# EAGLE board 13848-LilyPad-E-Sewing-Kit-Panel_v15 (EAGLE 7.7.0), part 1 of 2
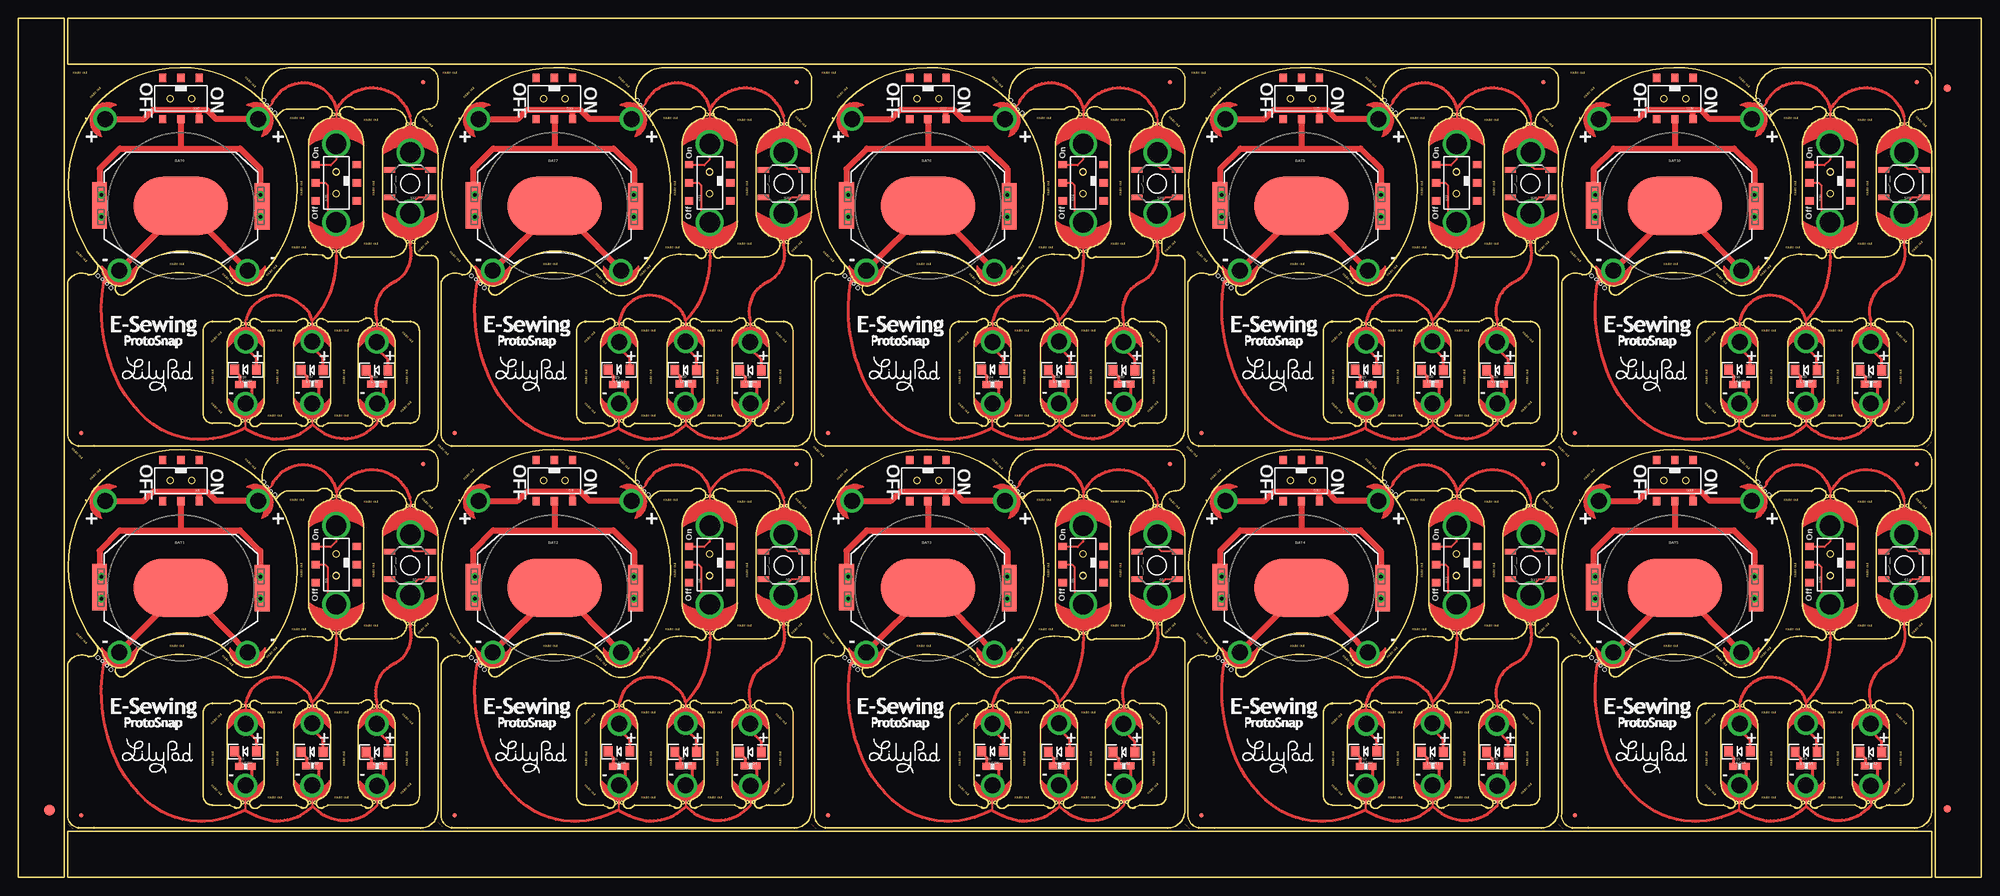
[diagram p0: board, top side]
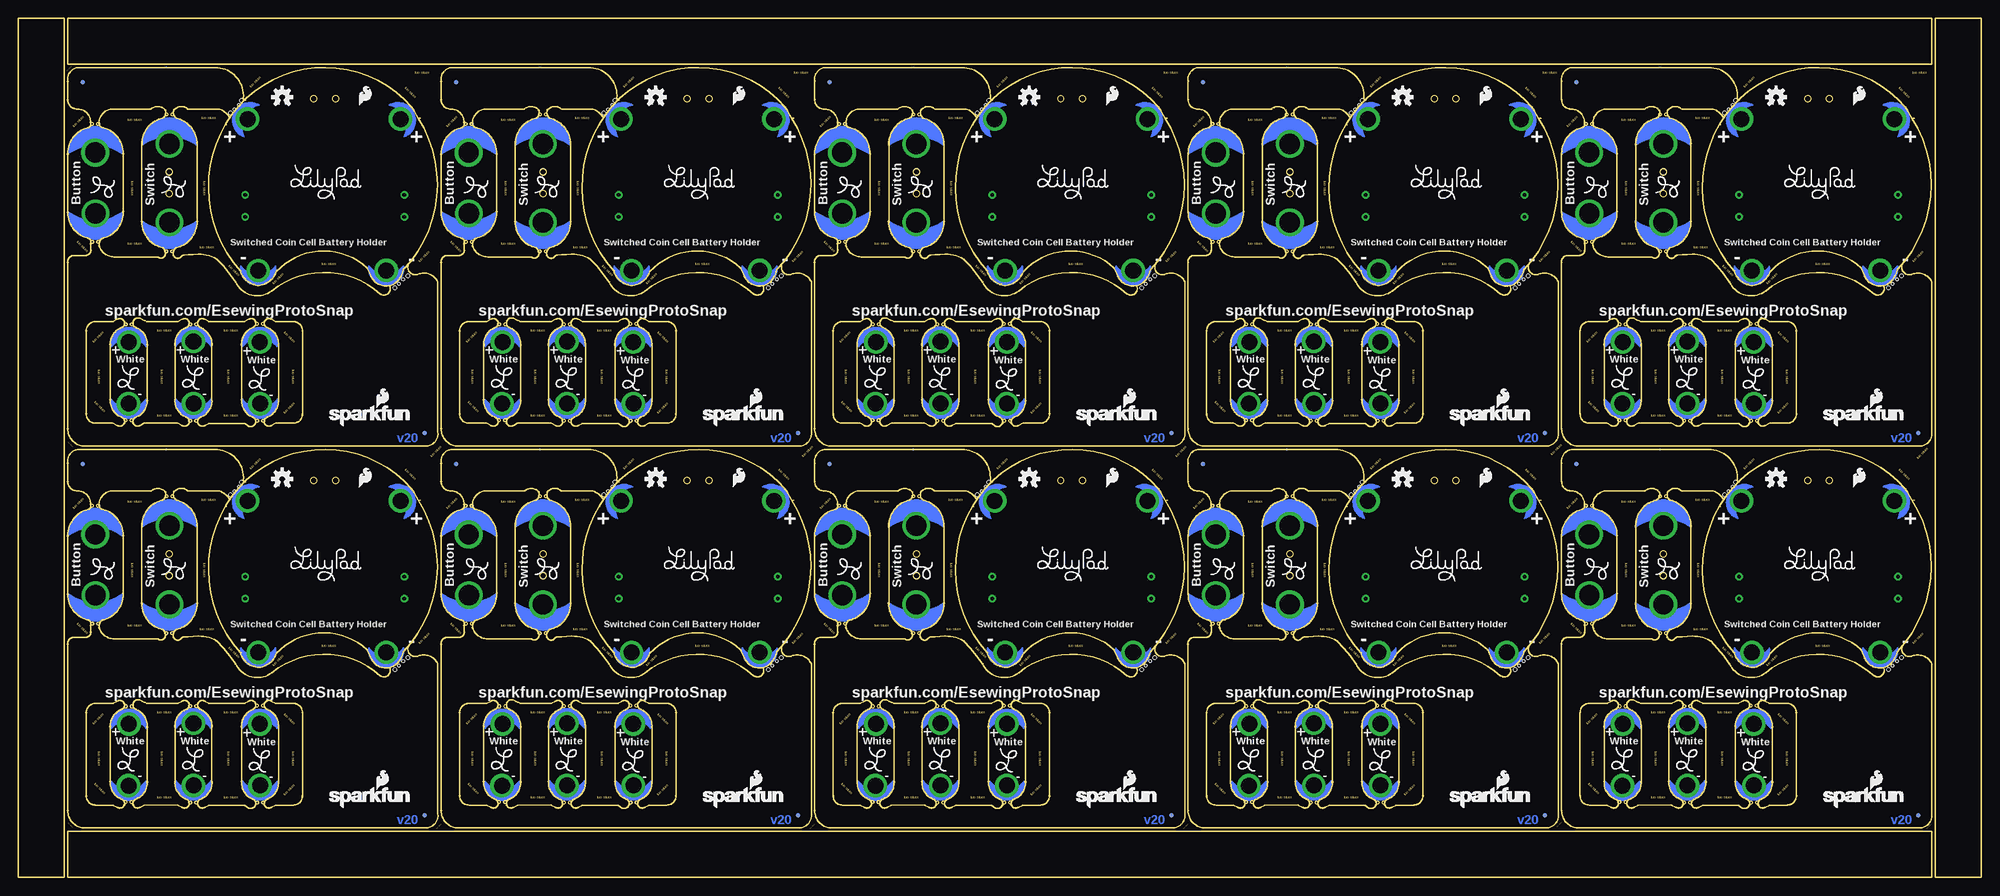
[diagram p1: board, bottom side, seen from below]

Size 269.7 x 118.08 mm. Coordinates in mm from the lower left corner, seen from the top.
Outline: 10824 segments
Outline: circle at 43.28,52.36 radius 0.19
Outline: circle at 44.12,52.36 radius 0.19
Outline: circle at 53.49,51.07 radius 0.19
Outline: circle at 54.33,51.07 radius 0.19
Outline: circle at 48.85,23.51 radius 0.19
Outline: circle at 49.68,23.51 radius 0.19
Outline: circle at 39.96,23.54 radius 0.19
Outline: circle at 40.79,23.54 radius 0.19
Outline: circle at 30.84,23.61 radius 0.19
Outline: circle at 31.68,23.61 radius 0.19
Outline: circle at 31.63,10.28 radius 0.19
Outline: circle at 30.79,10.28 radius 0.19
Outline: circle at 40.82,10.28 radius 0.19
Outline: circle at 39.98,10.28 radius 0.19
Outline: circle at 49.71,10.35 radius 0.19
Outline: circle at 48.87,10.35 radius 0.19
Outline: circle at 54.28,34.86 radius 0.19
Outline: circle at 53.44,34.86 radius 0.19
Outline: circle at 44.15,33.57 radius 0.19
Outline: circle at 43.31,33.57 radius 0.19
Copper layers (1*16): Top 0.035mm / dielectric 1.5mm / Bottom 0.035mm
Design rules "SparkFun-2-layer-STANDARD *": minimum track width 10mil, minimum drill 20mil, track to track 10mil, track to pad 8mil, pad to pad 8mil, via to via 10mil, smd to smd 8mil, copper to edge 8mil, drill to drill 8mil, minimum pad ring 10mil, minimum via ring 10mil, stop-mask expansion 4mil, vias tented up to drill 25mil, thermal gap 10mil
Net classes: 1 VCC: width 0.203 mm
Holes 0.51 mm at 10.93,30.21 12.74,28.53 33.78,54.3 35.29,52.6 62.24,30.21 64.05,28.53 85.08,54.3 86.6,52.6 113.55,30.21 115.35,28.53 136.39,54.3 137.91,52.6 164.86,30.21 166.66,28.53 187.7,54.3 189.22,52.6 216.17,30.21 217.97,28.53 239.01,54.3 240.53,52.6 10.93,82.68 12.74,81.01 33.78,106.77 35.29,105.08 62.24,82.68 64.05,81.01 85.08,106.77 86.6,105.08 113.55,82.68 115.35,81.01 136.39,106.77 137.91,105.08 164.86,82.68 166.66,81.01 187.7,106.77 189.22,105.08 216.17,82.68 217.97,81.01 239.01,106.77 240.53,105.08

## Footprints (pad centres in the part's own frame; a part is rotated, then mirrored left to right if it is on the bottom)
BATTCON_20MM_4LEGS = smd 13 x 8: NEGATIVE 0,0 | smd 2.032 x 3.175: POSITIVE@1 -11.176,1.651; POSITIVE@2 -11.176,-1.524; POSITIVE@3 11.176,1.524; POSITIVE@4 11.176,-1.651
PETAL-SMALL-2SIDE = drill 2.2: 1 0,0
PETAL-MEDIUM-2SIDE = drill 2.794: 1 0,-0.254
FIDUCIAL-1.5X3 = smd 1.5 x 1.5: 1 0,0
FIDUCIAL-1X2 = smd 1 x 1: 1 0,0
MICRO-FIDUCIAL = smd 0.635 x 0.635: 1 0,0
LED-1206 = smd 1.2 x 1.4: A -1.5,0; C 1.5,0
MOUST-BITE-1-(2_HOLES) = smd 0.203 x 0.508 bottom: P$1 -0.013,0 | hole 0.381: -0.432,0; 0.406,0
0603-RES = smd 1.1 x 1: 1 -0.85,0; 2 0.85,0
AYZ0202 = smd 1 x 1.15: 1 -2.5,2.825; 2 0,2.825; 3 2.5,2.825; 4 -2.5,-2.825; 5 0,-2.825; 6 2.5,-2.825 | hole 0.85: 1.5,0; -1.5,0
TACTILE-SWITCH-SMD = smd 1.524 x 0.762: 1 -2.794,1.905; 2 2.794,1.905; 3 -2.794,-1.905; 4 2.794,-1.905

## Placement (x,y rotation side)
BAT1  20mm coincell  [BATTCON_20MM_4LEGS]  22.35,39.82 0 top
BAT2  20mm coincell  [BATTCON_20MM_4LEGS]  73.66,39.82 0 top
BAT3  20mm coincell  [BATTCON_20MM_4LEGS]  124.97,39.82 0 top
BAT4  20mm coincell  [BATTCON_20MM_4LEGS]  176.28,39.82 0 top
BAT5  20mm coincell  [BATTCON_20MM_4LEGS]  227.59,39.82 0 top
BAT6  20mm coincell  [BATTCON_20MM_4LEGS]  22.35,92.29 0 top
BAT7  20mm coincell  [BATTCON_20MM_4LEGS]  73.66,92.29 0 top
BAT8  20mm coincell  [BATTCON_20MM_4LEGS]  124.97,92.29 0 top
BAT9  20mm coincell  [BATTCON_20MM_4LEGS]  176.28,92.29 0 top
BAT10  20mm coincell  [BATTCON_20MM_4LEGS]  227.59,92.29 0 top
BATB-  SEWTAP6  [PETAL-SMALL-2SIDE]  13.9,30.93 0 top
BATB-1  SEWTAP6  [PETAL-SMALL-2SIDE]  65.2,30.93 0 top
BATB-2  SEWTAP6  [PETAL-SMALL-2SIDE]  31.5,30.92 0 top
BATB-3  SEWTAP6  [PETAL-SMALL-2SIDE]  82.81,30.92 0 top
BATB-4  SEWTAP6  [PETAL-SMALL-2SIDE]  116.51,30.93 0 top
BATB-5  SEWTAP6  [PETAL-SMALL-2SIDE]  134.11,30.92 0 top
BATB-6  SEWTAP6  [PETAL-SMALL-2SIDE]  167.82,30.93 0 top
BATB-7  SEWTAP6  [PETAL-SMALL-2SIDE]  185.42,30.92 0 top
BATB-8  SEWTAP6  [PETAL-SMALL-2SIDE]  219.13,30.93 0 top
BATB-9  SEWTAP6  [PETAL-SMALL-2SIDE]  236.73,30.92 0 top
BATB-10  SEWTAP6  [PETAL-SMALL-2SIDE]  13.9,83.4 0 top
BATB-11  SEWTAP6  [PETAL-SMALL-2SIDE]  31.5,83.4 0 top
BATB-12  SEWTAP6  [PETAL-SMALL-2SIDE]  65.2,83.4 0 top
BATB-13  SEWTAP6  [PETAL-SMALL-2SIDE]  82.81,83.4 0 top
BATB-14  SEWTAP6  [PETAL-SMALL-2SIDE]  116.51,83.4 0 top
BATB-15  SEWTAP6  [PETAL-SMALL-2SIDE]  134.11,83.4 0 top
BATB-16  SEWTAP6  [PETAL-SMALL-2SIDE]  167.82,83.4 0 top
BATB-17  SEWTAP6  [PETAL-SMALL-2SIDE]  185.42,83.4 0 top
BATB-18  SEWTAP6  [PETAL-SMALL-2SIDE]  219.13,83.4 0 top
BATB-19  SEWTAP6  [PETAL-SMALL-2SIDE]  236.73,83.4 0 top
BATT+  SEWTAP6  [PETAL-SMALL-2SIDE]  11.94,51.76 245 top
BATT+1  SEWTAP6  [PETAL-SMALL-2SIDE]  63.25,51.76 245 top
BATT+2  SEWTAP6  [PETAL-SMALL-2SIDE]  32.95,51.76 115 top
BATT+3  SEWTAP6  [PETAL-SMALL-2SIDE]  84.25,51.76 115 top
BATT+4  SEWTAP6  [PETAL-SMALL-2SIDE]  114.56,51.76 245 top
BATT+5  SEWTAP6  [PETAL-SMALL-2SIDE]  135.56,51.76 115 top
BATT+6  SEWTAP6  [PETAL-SMALL-2SIDE]  165.86,51.76 245 top
BATT+7  SEWTAP6  [PETAL-SMALL-2SIDE]  186.87,51.76 115 top
BATT+8  SEWTAP6  [PETAL-SMALL-2SIDE]  217.17,51.76 245 top
BATT+9  SEWTAP6  [PETAL-SMALL-2SIDE]  238.18,51.76 115 top
BATT+10  SEWTAP6  [PETAL-SMALL-2SIDE]  11.94,104.23 245 top
BATT+11  SEWTAP6  [PETAL-SMALL-2SIDE]  32.95,104.23 115 top
BATT+12  SEWTAP6  [PETAL-SMALL-2SIDE]  63.25,104.23 245 top
BATT+13  SEWTAP6  [PETAL-SMALL-2SIDE]  84.25,104.23 115 top
BATT+14  SEWTAP6  [PETAL-SMALL-2SIDE]  114.56,104.23 245 top
BATT+15  SEWTAP6  [PETAL-SMALL-2SIDE]  135.56,104.23 115 top
BATT+16  SEWTAP6  [PETAL-SMALL-2SIDE]  165.86,104.23 245 top
BATT+17  SEWTAP6  [PETAL-SMALL-2SIDE]  186.87,104.23 115 top
BATT+18  SEWTAP6  [PETAL-SMALL-2SIDE]  217.17,104.23 245 top
BATT+19  SEWTAP6  [PETAL-SMALL-2SIDE]  238.18,104.23 115 top
BUTTON-  SEWTAP8  [PETAL-MEDIUM-2SIDE]  53.89,46.89 180 top
BUTTON-1  SEWTAP8  [PETAL-MEDIUM-2SIDE]  105.2,46.89 180 top
BUTTON-2  SEWTAP8  [PETAL-MEDIUM-2SIDE]  156.51,46.89 180 top
BUTTON-3  SEWTAP8  [PETAL-MEDIUM-2SIDE]  207.82,46.89 180 top
BUTTON-4  SEWTAP8  [PETAL-MEDIUM-2SIDE]  259.12,46.89 180 top
BUTTON-5  SEWTAP8  [PETAL-MEDIUM-2SIDE]  53.89,99.36 180 top
BUTTON-6  SEWTAP8  [PETAL-MEDIUM-2SIDE]  105.2,99.36 180 top
BUTTON-7  SEWTAP8  [PETAL-MEDIUM-2SIDE]  156.51,99.36 180 top
BUTTON-8  SEWTAP8  [PETAL-MEDIUM-2SIDE]  207.82,99.36 180 top
BUTTON-9  SEWTAP8  [PETAL-MEDIUM-2SIDE]  259.12,99.36 180 top
BUTTONS  SEWTAP8  [PETAL-MEDIUM-2SIDE]  53.85,39.06 0 top
BUTTONS1  SEWTAP8  [PETAL-MEDIUM-2SIDE]  105.16,39.06 0 top
BUTTONS2  SEWTAP8  [PETAL-MEDIUM-2SIDE]  156.47,39.06 0 top
BUTTONS3  SEWTAP8  [PETAL-MEDIUM-2SIDE]  207.77,39.06 0 top
BUTTONS4  SEWTAP8  [PETAL-MEDIUM-2SIDE]  259.08,39.06 0 top
BUTTONS5  SEWTAP8  [PETAL-MEDIUM-2SIDE]  53.85,91.53 0 top
BUTTONS6  SEWTAP8  [PETAL-MEDIUM-2SIDE]  105.16,91.53 0 top
BUTTONS7  SEWTAP8  [PETAL-MEDIUM-2SIDE]  156.47,91.53 0 top
BUTTONS8  SEWTAP8  [PETAL-MEDIUM-2SIDE]  207.77,91.53 0 top
BUTTONS9  SEWTAP8  [PETAL-MEDIUM-2SIDE]  259.08,91.53 0 top
E$1  [FIDUCIAL-1.5X3]  4.32,9.27 0 top
E$3  [FIDUCIAL-1X2]  265,108.48 180 top
E$4  [FIDUCIAL-1X2]  265,9.42 0 top
FD1  FIDUCIALUFIDUCIAL  [MICRO-FIDUCIAL]  55.63,56.84 0 top
FD2  FIDUCIALUFIDUCIAL  [MICRO-FIDUCIAL]  8.64,8.58 0 top
FD3  FIDUCIALUFIDUCIAL  [MICRO-FIDUCIAL]  55.63,56.84 0 bottom
FD4  FIDUCIALUFIDUCIAL  [MICRO-FIDUCIAL]  8.64,8.58 0 bottom
FD5  FIDUCIALUFIDUCIAL  [MICRO-FIDUCIAL]  106.94,56.84 0 top
FD6  FIDUCIALUFIDUCIAL  [MICRO-FIDUCIAL]  59.95,8.58 0 top
FD7  FIDUCIALUFIDUCIAL  [MICRO-FIDUCIAL]  106.94,56.84 0 bottom
FD8  FIDUCIALUFIDUCIAL  [MICRO-FIDUCIAL]  59.95,8.58 0 bottom
FD9  FIDUCIALUFIDUCIAL  [MICRO-FIDUCIAL]  158.24,56.84 0 top
FD10  FIDUCIALUFIDUCIAL  [MICRO-FIDUCIAL]  111.25,8.58 0 top
FD11  FIDUCIALUFIDUCIAL  [MICRO-FIDUCIAL]  158.24,56.84 0 bottom
FD12  FIDUCIALUFIDUCIAL  [MICRO-FIDUCIAL]  111.25,8.58 0 bottom
FD13  FIDUCIALUFIDUCIAL  [MICRO-FIDUCIAL]  209.55,56.84 0 top
FD14  FIDUCIALUFIDUCIAL  [MICRO-FIDUCIAL]  162.56,8.58 0 top
FD15  FIDUCIALUFIDUCIAL  [MICRO-FIDUCIAL]  209.55,56.84 0 bottom
FD16  FIDUCIALUFIDUCIAL  [MICRO-FIDUCIAL]  162.56,8.58 0 bottom
FD17  FIDUCIALUFIDUCIAL  [MICRO-FIDUCIAL]  260.86,56.84 0 top
FD18  FIDUCIALUFIDUCIAL  [MICRO-FIDUCIAL]  213.87,8.58 0 top
FD19  FIDUCIALUFIDUCIAL  [MICRO-FIDUCIAL]  260.86,56.84 0 bottom
FD20  FIDUCIALUFIDUCIAL  [MICRO-FIDUCIAL]  213.87,8.58 0 bottom
FD21  FIDUCIALUFIDUCIAL  [MICRO-FIDUCIAL]  55.63,109.31 0 top
FD22  FIDUCIALUFIDUCIAL  [MICRO-FIDUCIAL]  8.64,61.05 0 top
FD23  FIDUCIALUFIDUCIAL  [MICRO-FIDUCIAL]  55.63,109.31 0 bottom
FD24  FIDUCIALUFIDUCIAL  [MICRO-FIDUCIAL]  8.64,61.05 0 bottom
FD25  FIDUCIALUFIDUCIAL  [MICRO-FIDUCIAL]  106.94,109.31 0 top
FD26  FIDUCIALUFIDUCIAL  [MICRO-FIDUCIAL]  59.95,61.05 0 top
FD27  FIDUCIALUFIDUCIAL  [MICRO-FIDUCIAL]  106.94,109.31 0 bottom
FD28  FIDUCIALUFIDUCIAL  [MICRO-FIDUCIAL]  59.95,61.05 0 bottom
FD29  FIDUCIALUFIDUCIAL  [MICRO-FIDUCIAL]  158.24,109.31 0 top
FD30  FIDUCIALUFIDUCIAL  [MICRO-FIDUCIAL]  111.25,61.05 0 top
FD31  FIDUCIALUFIDUCIAL  [MICRO-FIDUCIAL]  158.24,109.31 0 bottom
FD32  FIDUCIALUFIDUCIAL  [MICRO-FIDUCIAL]  111.25,61.05 0 bottom
FD33  FIDUCIALUFIDUCIAL  [MICRO-FIDUCIAL]  209.55,109.31 0 top
FD34  FIDUCIALUFIDUCIAL  [MICRO-FIDUCIAL]  162.56,61.05 0 top
FD35  FIDUCIALUFIDUCIAL  [MICRO-FIDUCIAL]  209.55,109.31 0 bottom
FD36  FIDUCIALUFIDUCIAL  [MICRO-FIDUCIAL]  162.56,61.05 0 bottom
FD37  FIDUCIALUFIDUCIAL  [MICRO-FIDUCIAL]  260.86,109.31 0 top
FD38  FIDUCIALUFIDUCIAL  [MICRO-FIDUCIAL]  213.87,61.05 0 top
FD39  FIDUCIALUFIDUCIAL  [MICRO-FIDUCIAL]  260.86,109.31 0 bottom
FD40  FIDUCIALUFIDUCIAL  [MICRO-FIDUCIAL]  213.87,61.05 0 bottom
LED1  WHITE  [LED-1206]  49.3,17.22 180 top
LED2  WHITE  [LED-1206]  40.39,17.27 180 top
LED3  WHITE  [LED-1206]  31.24,17.32 180 top
LED4  WHITE  [LED-1206]  100.6,17.22 180 top
LED5  WHITE  [LED-1206]  91.69,17.27 180 top
LED6  WHITE  [LED-1206]  82.54,17.32 180 top
LED7  WHITE  [LED-1206]  151.91,17.22 180 top
LED8  WHITE  [LED-1206]  143,17.27 180 top
LED9  WHITE  [LED-1206]  133.85,17.32 180 top
LED10  WHITE  [LED-1206]  203.22,17.22 180 top
LED11  WHITE  [LED-1206]  194.31,17.27 180 top
LED12  WHITE  [LED-1206]  185.16,17.32 180 top
LED13  WHITE  [LED-1206]  254.53,17.22 180 top
LED14  WHITE  [LED-1206]  245.62,17.27 180 top
LED15  WHITE  [LED-1206]  236.47,17.32 180 top
LED16  WHITE  [LED-1206]  49.3,69.7 180 top
LED17  WHITE  [LED-1206]  40.39,69.74 180 top
LED18  WHITE  [LED-1206]  31.24,69.79 180 top
LED19  WHITE  [LED-1206]  100.6,69.7 180 top
LED20  WHITE  [LED-1206]  91.69,69.74 180 top
LED21  WHITE  [LED-1206]  82.54,69.79 180 top
LED22  WHITE  [LED-1206]  151.91,69.7 180 top
LED23  WHITE  [LED-1206]  143,69.74 180 top
LED24  WHITE  [LED-1206]  133.85,69.79 180 top
LED25  WHITE  [LED-1206]  203.22,69.7 180 top
LED26  WHITE  [LED-1206]  194.31,69.74 180 top
LED27  WHITE  [LED-1206]  185.16,69.79 180 top
LED28  WHITE  [LED-1206]  254.53,69.7 180 top
LED29  WHITE  [LED-1206]  245.62,69.74 180 top
LED30  WHITE  [LED-1206]  236.47,69.79 180 top
LED+1  SEWTAP6  [PETAL-SMALL-2SIDE]  49.25,21.1 180 top
LED+2  SEWTAP6  [PETAL-SMALL-2SIDE]  40.39,21.17 180 top
LED+3  SEWTAP6  [PETAL-SMALL-2SIDE]  31.27,21.1 180 top
LED+4  SEWTAP6  [PETAL-SMALL-2SIDE]  100.56,21.1 180 top
LED+5  SEWTAP6  [PETAL-SMALL-2SIDE]  91.7,21.17 180 top
LED+6  SEWTAP6  [PETAL-SMALL-2SIDE]  82.58,21.1 180 top
LED+7  SEWTAP6  [PETAL-SMALL-2SIDE]  151.87,21.1 180 top
LED+8  SEWTAP6  [PETAL-SMALL-2SIDE]  143,21.17 180 top
LED+9  SEWTAP6  [PETAL-SMALL-2SIDE]  133.89,21.1 180 top
LED+10  SEWTAP6  [PETAL-SMALL-2SIDE]  203.18,21.1 180 top
LED+11  SEWTAP6  [PETAL-SMALL-2SIDE]  194.31,21.17 180 top
LED+12  SEWTAP6  [PETAL-SMALL-2SIDE]  185.19,21.1 180 top
LED+13  SEWTAP6  [PETAL-SMALL-2SIDE]  254.49,21.1 180 top
LED+14  SEWTAP6  [PETAL-SMALL-2SIDE]  245.62,21.17 180 top
LED+15  SEWTAP6  [PETAL-SMALL-2SIDE]  236.5,21.1 180 top
LED+16  SEWTAP6  [PETAL-SMALL-2SIDE]  49.25,73.57 180 top
LED+17  SEWTAP6  [PETAL-SMALL-2SIDE]  40.39,73.65 180 top
LED+18  SEWTAP6  [PETAL-SMALL-2SIDE]  31.27,73.57 180 top
LED+19  SEWTAP6  [PETAL-SMALL-2SIDE]  100.56,73.57 180 top
LED+20  SEWTAP6  [PETAL-SMALL-2SIDE]  91.7,73.65 180 top
LED+21  SEWTAP6  [PETAL-SMALL-2SIDE]  82.58,73.57 180 top
LED+22  SEWTAP6  [PETAL-SMALL-2SIDE]  151.87,73.57 180 top
LED+23  SEWTAP6  [PETAL-SMALL-2SIDE]  143,73.65 180 top
LED+24  SEWTAP6  [PETAL-SMALL-2SIDE]  133.89,73.57 180 top
LED+25  SEWTAP6  [PETAL-SMALL-2SIDE]  203.18,73.57 180 top
LED+26  SEWTAP6  [PETAL-SMALL-2SIDE]  194.31,73.65 180 top
LED+27  SEWTAP6  [PETAL-SMALL-2SIDE]  185.19,73.57 180 top
LED+28  SEWTAP6  [PETAL-SMALL-2SIDE]  254.49,73.57 180 top
LED+29  SEWTAP6  [PETAL-SMALL-2SIDE]  245.62,73.65 180 top
LED+30  SEWTAP6  [PETAL-SMALL-2SIDE]  236.5,73.57 180 top
LED-1  SEWTAP6  [PETAL-SMALL-2SIDE]  49.31,12.63 0 top
LED-2  SEWTAP6  [PETAL-SMALL-2SIDE]  40.38,12.65 0 top
LED-3  SEWTAP6  [PETAL-SMALL-2SIDE]  31.24,12.64 0 top
LED-4  SEWTAP6  [PETAL-SMALL-2SIDE]  100.61,12.63 0 top
LED-5  SEWTAP6  [PETAL-SMALL-2SIDE]  91.68,12.65 0 top
LED-6  SEWTAP6  [PETAL-SMALL-2SIDE]  82.55,12.64 0 top
LED-7  SEWTAP6  [PETAL-SMALL-2SIDE]  151.92,12.63 0 top
LED-8  SEWTAP6  [PETAL-SMALL-2SIDE]  142.99,12.65 0 top
LED-9  SEWTAP6  [PETAL-SMALL-2SIDE]  133.86,12.64 0 top
LED-10  SEWTAP6  [PETAL-SMALL-2SIDE]  203.23,12.63 0 top
LED-11  SEWTAP6  [PETAL-SMALL-2SIDE]  194.3,12.65 0 top
LED-12  SEWTAP6  [PETAL-SMALL-2SIDE]  185.17,12.64 0 top
LED-13  SEWTAP6  [PETAL-SMALL-2SIDE]  254.54,12.63 0 top
LED-14  SEWTAP6  [PETAL-SMALL-2SIDE]  245.61,12.65 0 top
LED-15  SEWTAP6  [PETAL-SMALL-2SIDE]  236.48,12.64 0 top
LED-16  SEWTAP6  [PETAL-SMALL-2SIDE]  49.31,65.1 0 top
LED-17  SEWTAP6  [PETAL-SMALL-2SIDE]  40.38,65.13 0 top
LED-18  SEWTAP6  [PETAL-SMALL-2SIDE]  31.24,65.12 0 top
LED-19  SEWTAP6  [PETAL-SMALL-2SIDE]  100.61,65.1 0 top
LED-20  SEWTAP6  [PETAL-SMALL-2SIDE]  91.68,65.13 0 top
LED-21  SEWTAP6  [PETAL-SMALL-2SIDE]  82.55,65.12 0 top
LED-22  SEWTAP6  [PETAL-SMALL-2SIDE]  151.92,65.1 0 top
LED-23  SEWTAP6  [PETAL-SMALL-2SIDE]  142.99,65.13 0 top
LED-24  SEWTAP6  [PETAL-SMALL-2SIDE]  133.86,65.12 0 top
LED-25  SEWTAP6  [PETAL-SMALL-2SIDE]  203.23,65.1 0 top
LED-26  SEWTAP6  [PETAL-SMALL-2SIDE]  194.3,65.13 0 top
LED-27  SEWTAP6  [PETAL-SMALL-2SIDE]  185.17,65.12 0 top
LED-28  SEWTAP6  [PETAL-SMALL-2SIDE]  254.54,65.1 0 top
LED-29  SEWTAP6  [PETAL-SMALL-2SIDE]  245.61,65.13 0 top
LED-30  SEWTAP6  [PETAL-SMALL-2SIDE]  236.48,65.12 0 top
LOGO1  SFE_LOGO_FLAME.1_INCH  [SFE_LOGO_FLAME_.1]  17.91,53.33 0 bottom
LOGO2  OSHW-LOGOS  [OSHW-LOGO-S]  28.2,54.75 0 bottom
LOGO3  SFE_LOGO_NAME_FLAME.1_INCH  [SFE_LOGO_NAME_FLAME_.1]  22.1,9.46 0 bottom
LOGO4  SFE_LOGO_FLAME.1_INCH  [SFE_LOGO_FLAME_.1]  69.22,53.33 0 bottom
LOGO5  OSHW-LOGOS  [OSHW-LOGO-S]  79.5,54.75 0 bottom
LOGO6  SFE_LOGO_NAME_FLAME.1_INCH  [SFE_LOGO_NAME_FLAME_.1]  73.41,9.46 0 bottom
LOGO7  SFE_LOGO_FLAME.1_INCH  [SFE_LOGO_FLAME_.1]  120.53,53.33 0 bottom
LOGO8  OSHW-LOGOS  [OSHW-LOGO-S]  130.81,54.75 0 bottom
LOGO9  SFE_LOGO_NAME_FLAME.1_INCH  [SFE_LOGO_NAME_FLAME_.1]  124.72,9.46 0 bottom
LOGO10  SFE_LOGO_FLAME.1_INCH  [SFE_LOGO_FLAME_.1]  171.83,53.33 0 bottom
LOGO11  OSHW-LOGOS  [OSHW-LOGO-S]  182.12,54.75 0 bottom
LOGO12  SFE_LOGO_NAME_FLAME.1_INCH  [SFE_LOGO_NAME_FLAME_.1]  176.02,9.46 0 bottom
LOGO13  SFE_LOGO_FLAME.1_INCH  [SFE_LOGO_FLAME_.1]  223.14,53.33 0 bottom
LOGO14  OSHW-LOGOS  [OSHW-LOGO-S]  233.43,54.75 0 bottom
LOGO15  SFE_LOGO_NAME_FLAME.1_INCH  [SFE_LOGO_NAME_FLAME_.1]  227.33,9.46 0 bottom
LOGO16  SFE_LOGO_FLAME.1_INCH  [SFE_LOGO_FLAME_.1]  17.91,105.81 0 bottom
LOGO17  OSHW-LOGOS  [OSHW-LOGO-S]  28.2,107.23 0 bottom
LOGO18  SFE_LOGO_NAME_FLAME.1_INCH  [SFE_LOGO_NAME_FLAME_.1]  22.1,61.94 0 bottom
LOGO19  SFE_LOGO_FLAME.1_INCH  [SFE_LOGO_FLAME_.1]  69.22,105.81 0 bottom
LOGO20  OSHW-LOGOS  [OSHW-LOGO-S]  79.5,107.23 0 bottom
LOGO21  SFE_LOGO_NAME_FLAME.1_INCH  [SFE_LOGO_NAME_FLAME_.1]  73.41,61.94 0 bottom
LOGO22  SFE_LOGO_FLAME.1_INCH  [SFE_LOGO_FLAME_.1]  120.53,105.81 0 bottom
LOGO23  OSHW-LOGOS  [OSHW-LOGO-S]  130.81,107.23 0 bottom
LOGO24  SFE_LOGO_NAME_FLAME.1_INCH  [SFE_LOGO_NAME_FLAME_.1]  124.72,61.94 0 bottom
LOGO25  SFE_LOGO_FLAME.1_INCH  [SFE_LOGO_FLAME_.1]  171.83,105.81 0 bottom
LOGO26  OSHW-LOGOS  [OSHW-LOGO-S]  182.12,107.23 0 bottom
LOGO27  SFE_LOGO_NAME_FLAME.1_INCH  [SFE_LOGO_NAME_FLAME_.1]  176.02,61.94 0 bottom
LOGO28  SFE_LOGO_FLAME.1_INCH  [SFE_LOGO_FLAME_.1]  223.14,105.81 0 bottom
LOGO29  OSHW-LOGOS  [OSHW-LOGO-S]  233.43,107.23 0 bottom
LOGO30  SFE_LOGO_NAME_FLAME.1_INCH  [SFE_LOGO_NAME_FLAME_.1]  227.33,61.94 0 bottom
MB1  MOUSE-BITE-12_HOLES  [MOUST-BITE-1-(2_HOLES)]  43.69,52.39 0 bottom
MB2  MOUSE-BITE-12_HOLES  [MOUST-BITE-1-(2_HOLES)]  53.88,51.09 0 bottom
MB3  MOUSE-BITE-12_HOLES  [MOUST-BITE-1-(2_HOLES)]  49.28,23.51 0 bottom
MB4  MOUSE-BITE-12_HOLES  [MOUST-BITE-1-(2_HOLES)]  40.41,23.54 0 bottom
MB5  MOUSE-BITE-12_HOLES  [MOUST-BITE-1-(2_HOLES)]  31.24,23.61 0 bottom
MB6  MOUSE-BITE-12_HOLES  [MOUST-BITE-1-(2_HOLES)]  31.22,10.28 0 bottom
MB7  MOUSE-BITE-12_HOLES  [MOUST-BITE-1-(2_HOLES)]  40.41,10.28 0 bottom
MB8  MOUSE-BITE-12_HOLES  [MOUST-BITE-1-(2_HOLES)]  49.3,10.35 0 bottom
MB9  MOUSE-BITE-12_HOLES  [MOUST-BITE-1-(2_HOLES)]  53.88,34.86 0 bottom
MB10  MOUSE-BITE-12_HOLES  [MOUST-BITE-1-(2_HOLES)]  43.72,33.57 180 bottom
MB11  MOUSE-BITE-12_HOLES  [MOUST-BITE-1-(2_HOLES)]  95,52.39 0 bottom
MB12  MOUSE-BITE-12_HOLES  [MOUST-BITE-1-(2_HOLES)]  95.02,33.57 180 bottom
MB13  MOUSE-BITE-12_HOLES  [MOUST-BITE-1-(2_HOLES)]  105.18,51.09 0 bottom
MB14  MOUSE-BITE-12_HOLES  [MOUST-BITE-1-(2_HOLES)]  100.59,23.51 0 bottom
MB15  MOUSE-BITE-12_HOLES  [MOUST-BITE-1-(2_HOLES)]  91.72,23.54 0 bottom
MB16  MOUSE-BITE-12_HOLES  [MOUST-BITE-1-(2_HOLES)]  82.55,23.61 0 bottom
MB17  MOUSE-BITE-12_HOLES  [MOUST-BITE-1-(2_HOLES)]  82.53,10.28 0 bottom
MB18  MOUSE-BITE-12_HOLES  [MOUST-BITE-1-(2_HOLES)]  91.72,10.28 0 bottom
MB19  MOUSE-BITE-12_HOLES  [MOUST-BITE-1-(2_HOLES)]  100.61,10.35 0 bottom
MB20  MOUSE-BITE-12_HOLES  [MOUST-BITE-1-(2_HOLES)]  105.18,34.86 0 bottom
MB21  MOUSE-BITE-12_HOLES  [MOUST-BITE-1-(2_HOLES)]  146.31,52.39 0 bottom
MB22  MOUSE-BITE-12_HOLES  [MOUST-BITE-1-(2_HOLES)]  146.33,33.57 180 bottom
MB23  MOUSE-BITE-12_HOLES  [MOUST-BITE-1-(2_HOLES)]  156.49,51.09 0 bottom
MB24  MOUSE-BITE-12_HOLES  [MOUST-BITE-1-(2_HOLES)]  151.89,23.51 0 bottom
MB25  MOUSE-BITE-12_HOLES  [MOUST-BITE-1-(2_HOLES)]  143.03,23.54 0 bottom
MB26  MOUSE-BITE-12_HOLES  [MOUST-BITE-1-(2_HOLES)]  133.86,23.61 0 bottom
MB27  MOUSE-BITE-12_HOLES  [MOUST-BITE-1-(2_HOLES)]  133.84,10.28 0 bottom
MB28  MOUSE-BITE-12_HOLES  [MOUST-BITE-1-(2_HOLES)]  143.03,10.28 0 bottom
MB29  MOUSE-BITE-12_HOLES  [MOUST-BITE-1-(2_HOLES)]  151.92,10.35 0 bottom
MB30  MOUSE-BITE-12_HOLES  [MOUST-BITE-1-(2_HOLES)]  156.49,34.86 0 bottom
MB31  MOUSE-BITE-12_HOLES  [MOUST-BITE-1-(2_HOLES)]  197.61,52.39 0 bottom
MB32  MOUSE-BITE-12_HOLES  [MOUST-BITE-1-(2_HOLES)]  197.64,33.57 180 bottom
MB33  MOUSE-BITE-12_HOLES  [MOUST-BITE-1-(2_HOLES)]  207.8,51.09 0 bottom
MB34  MOUSE-BITE-12_HOLES  [MOUST-BITE-1-(2_HOLES)]  203.2,23.51 0 bottom
MB35  MOUSE-BITE-12_HOLES  [MOUST-BITE-1-(2_HOLES)]  194.34,23.54 0 bottom
MB36  MOUSE-BITE-12_HOLES  [MOUST-BITE-1-(2_HOLES)]  185.17,23.61 0 bottom
MB37  MOUSE-BITE-12_HOLES  [MOUST-BITE-1-(2_HOLES)]  185.14,10.28 0 bottom
MB38  MOUSE-BITE-12_HOLES  [MOUST-BITE-1-(2_HOLES)]  194.34,10.28 0 bottom
MB39  MOUSE-BITE-12_HOLES  [MOUST-BITE-1-(2_HOLES)]  203.23,10.35 0 bottom
MB40  MOUSE-BITE-12_HOLES  [MOUST-BITE-1-(2_HOLES)]  207.8,34.86 0 bottom
MB41  MOUSE-BITE-12_HOLES  [MOUST-BITE-1-(2_HOLES)]  248.92,52.39 0 bottom
MB42  MOUSE-BITE-12_HOLES  [MOUST-BITE-1-(2_HOLES)]  248.95,33.57 180 bottom
MB43  MOUSE-BITE-12_HOLES  [MOUST-BITE-1-(2_HOLES)]  259.11,51.09 0 bottom
MB44  MOUSE-BITE-12_HOLES  [MOUST-BITE-1-(2_HOLES)]  254.51,23.51 0 bottom
MB45  MOUSE-BITE-12_HOLES  [MOUST-BITE-1-(2_HOLES)]  245.65,23.54 0 bottom
MB46  MOUSE-BITE-12_HOLES  [MOUST-BITE-1-(2_HOLES)]  236.48,23.61 0 bottom
MB47  MOUSE-BITE-12_HOLES  [MOUST-BITE-1-(2_HOLES)]  236.45,10.28 0 bottom
MB48  MOUSE-BITE-12_HOLES  [MOUST-BITE-1-(2_HOLES)]  245.65,10.28 0 bottom
MB49  MOUSE-BITE-12_HOLES  [MOUST-BITE-1-(2_HOLES)]  254.54,10.35 0 bottom
MB50  MOUSE-BITE-12_HOLES  [MOUST-BITE-1-(2_HOLES)]  259.11,34.86 0 bottom
MB51  MOUSE-BITE-12_HOLES  [MOUST-BITE-1-(2_HOLES)]  43.69,104.87 0 bottom
MB52  MOUSE-BITE-12_HOLES  [MOUST-BITE-1-(2_HOLES)]  43.72,86.05 180 bottom
MB53  MOUSE-BITE-12_HOLES  [MOUST-BITE-1-(2_HOLES)]  53.88,103.57 0 bottom
MB54  MOUSE-BITE-12_HOLES  [MOUST-BITE-1-(2_HOLES)]  49.28,75.99 0 bottom
MB55  MOUSE-BITE-12_HOLES  [MOUST-BITE-1-(2_HOLES)]  40.41,76.01 0 bottom
MB56  MOUSE-BITE-12_HOLES  [MOUST-BITE-1-(2_HOLES)]  31.24,76.09 0 bottom
MB57  MOUSE-BITE-12_HOLES  [MOUST-BITE-1-(2_HOLES)]  31.22,62.75 0 bottom
MB58  MOUSE-BITE-12_HOLES  [MOUST-BITE-1-(2_HOLES)]  40.41,62.75 0 bottom
MB59  MOUSE-BITE-12_HOLES  [MOUST-BITE-1-(2_HOLES)]  49.3,62.83 0 bottom
MB60  MOUSE-BITE-12_HOLES  [MOUST-BITE-1-(2_HOLES)]  53.88,87.34 0 bottom
MB61  MOUSE-BITE-12_HOLES  [MOUST-BITE-1-(2_HOLES)]  95,104.87 0 bottom
MB62  MOUSE-BITE-12_HOLES  [MOUST-BITE-1-(2_HOLES)]  95.02,86.05 180 bottom
MB63  MOUSE-BITE-12_HOLES  [MOUST-BITE-1-(2_HOLES)]  105.18,103.57 0 bottom
MB64  MOUSE-BITE-12_HOLES  [MOUST-BITE-1-(2_HOLES)]  100.59,75.99 0 bottom
MB65  MOUSE-BITE-12_HOLES  [MOUST-BITE-1-(2_HOLES)]  91.72,76.01 0 bottom
MB66  MOUSE-BITE-12_HOLES  [MOUST-BITE-1-(2_HOLES)]  82.55,76.09 0 bottom
MB67  MOUSE-BITE-12_HOLES  [MOUST-BITE-1-(2_HOLES)]  82.53,62.75 0 bottom
MB68  MOUSE-BITE-12_HOLES  [MOUST-BITE-1-(2_HOLES)]  91.72,62.75 0 bottom
MB69  MOUSE-BITE-12_HOLES  [MOUST-BITE-1-(2_HOLES)]  100.61,62.83 0 bottom
MB70  MOUSE-BITE-12_HOLES  [MOUST-BITE-1-(2_HOLES)]  105.18,87.34 0 bottom
MB71  MOUSE-BITE-12_HOLES  [MOUST-BITE-1-(2_HOLES)]  146.31,104.87 0 bottom
MB72  MOUSE-BITE-12_HOLES  [MOUST-BITE-1-(2_HOLES)]  146.33,86.05 180 bottom
MB73  MOUSE-BITE-12_HOLES  [MOUST-BITE-1-(2_HOLES)]  156.49,103.57 0 bottom
MB74  MOUSE-BITE-12_HOLES  [MOUST-BITE-1-(2_HOLES)]  151.89,75.99 0 bottom
MB75  MOUSE-BITE-12_HOLES  [MOUST-BITE-1-(2_HOLES)]  143.03,76.01 0 bottom
MB76  MOUSE-BITE-12_HOLES  [MOUST-BITE-1-(2_HOLES)]  133.86,76.09 0 bottom
MB77  MOUSE-BITE-12_HOLES  [MOUST-BITE-1-(2_HOLES)]  133.84,62.75 0 bottom
MB78  MOUSE-BITE-12_HOLES  [MOUST-BITE-1-(2_HOLES)]  143.03,62.75 0 bottom
MB79  MOUSE-BITE-12_HOLES  [MOUST-BITE-1-(2_HOLES)]  151.92,62.83 0 bottom
MB80  MOUSE-BITE-12_HOLES  [MOUST-BITE-1-(2_HOLES)]  156.49,87.34 0 bottom
MB81  MOUSE-BITE-12_HOLES  [MOUST-BITE-1-(2_HOLES)]  197.61,104.87 0 bottom
MB82  MOUSE-BITE-12_HOLES  [MOUST-BITE-1-(2_HOLES)]  197.64,86.05 180 bottom
MB83  MOUSE-BITE-12_HOLES  [MOUST-BITE-1-(2_HOLES)]  207.8,103.57 0 bottom
MB84  MOUSE-BITE-12_HOLES  [MOUST-BITE-1-(2_HOLES)]  203.2,75.99 0 bottom
MB85  MOUSE-BITE-12_HOLES  [MOUST-BITE-1-(2_HOLES)]  194.34,76.01 0 bottom
MB86  MOUSE-BITE-12_HOLES  [MOUST-BITE-1-(2_HOLES)]  185.17,76.09 0 bottom
MB87  MOUSE-BITE-12_HOLES  [MOUST-BITE-1-(2_HOLES)]  185.14,62.75 0 bottom
MB88  MOUSE-BITE-12_HOLES  [MOUST-BITE-1-(2_HOLES)]  194.34,62.75 0 bottom
MB89  MOUSE-BITE-12_HOLES  [MOUST-BITE-1-(2_HOLES)]  203.23,62.83 0 bottom
MB90  MOUSE-BITE-12_HOLES  [MOUST-BITE-1-(2_HOLES)]  207.8,87.34 0 bottom
MB91  MOUSE-BITE-12_HOLES  [MOUST-BITE-1-(2_HOLES)]  248.92,104.87 0 bottom
MB92  MOUSE-BITE-12_HOLES  [MOUST-BITE-1-(2_HOLES)]  248.95,86.05 180 bottom
MB93  MOUSE-BITE-12_HOLES  [MOUST-BITE-1-(2_HOLES)]  259.11,103.57 0 bottom
MB94  MOUSE-BITE-12_HOLES  [MOUST-BITE-1-(2_HOLES)]  254.51,75.99 0 bottom
MB95  MOUSE-BITE-12_HOLES  [MOUST-BITE-1-(2_HOLES)]  245.65,76.01 0 bottom
MB96  MOUSE-BITE-12_HOLES  [MOUST-BITE-1-(2_HOLES)]  236.48,76.09 0 bottom
MB97  MOUSE-BITE-12_HOLES  [MOUST-BITE-1-(2_HOLES)]  236.45,62.75 0 bottom
MB98  MOUSE-BITE-12_HOLES  [MOUST-BITE-1-(2_HOLES)]  245.65,62.75 0 bottom
MB99  MOUSE-BITE-12_HOLES  [MOUST-BITE-1-(2_HOLES)]  254.54,62.83 0 bottom
MB100  MOUSE-BITE-12_HOLES  [MOUST-BITE-1-(2_HOLES)]  259.11,87.34 0 bottom
MB+  MOUSE-BITE-12_HOLES  [MOUST-BITE-1-(2_HOLES)]  34.44,53.38 225 bottom
MB+1  MOUSE-BITE-12_HOLES  [MOUST-BITE-1-(2_HOLES)]  85.75,53.38 225 bottom
MB+2  MOUSE-BITE-12_HOLES  [MOUST-BITE-1-(2_HOLES)]  137.06,53.38 225 bottom
MB+3  MOUSE-BITE-12_HOLES  [MOUST-BITE-1-(2_HOLES)]  188.37,53.38 225 bottom
MB+4  MOUSE-BITE-12_HOLES  [MOUST-BITE-1-(2_HOLES)]  239.68,53.38 225 bottom
MB+5  MOUSE-BITE-12_HOLES  [MOUST-BITE-1-(2_HOLES)]  34.44,105.86 225 bottom
MB+6  MOUSE-BITE-12_HOLES  [MOUST-BITE-1-(2_HOLES)]  85.75,105.86 225 bottom
MB+7  MOUSE-BITE-12_HOLES  [MOUST-BITE-1-(2_HOLES)]  137.06,105.86 225 bottom
MB+8  MOUSE-BITE-12_HOLES  [MOUST-BITE-1-(2_HOLES)]  188.37,105.86 225 bottom
MB+9  MOUSE-BITE-12_HOLES  [MOUST-BITE-1-(2_HOLES)]  239.68,105.86 225 bottom
MB-  MOUSE-BITE-12_HOLES  [MOUST-BITE-1-(2_HOLES)]  11.86,29.43 45 bottom
MB-1  MOUSE-BITE-12_HOLES  [MOUST-BITE-1-(2_HOLES)]  63.17,29.43 45 bottom
MB-2  MOUSE-BITE-12_HOLES  [MOUST-BITE-1-(2_HOLES)]  114.48,29.43 45 bottom
MB-3  MOUSE-BITE-12_HOLES  [MOUST-BITE-1-(2_HOLES)]  165.79,29.43 45 bottom
MB-4  MOUSE-BITE-12_HOLES  [MOUST-BITE-1-(2_HOLES)]  217.1,29.43 45 bottom
MB-5  MOUSE-BITE-12_HOLES  [MOUST-BITE-1-(2_HOLES)]  11.86,81.9 45 bottom
MB-6  MOUSE-BITE-12_HOLES  [MOUST-BITE-1-(2_HOLES)]  63.17,81.9 45 bottom
MB-7  MOUSE-BITE-12_HOLES  [MOUST-BITE-1-(2_HOLES)]  114.48,81.9 45 bottom
MB-8  MOUSE-BITE-12_HOLES  [MOUST-BITE-1-(2_HOLES)]  165.79,81.9 45 bottom
MB-9  MOUSE-BITE-12_HOLES  [MOUST-BITE-1-(2_HOLES)]  217.1,81.9 45 bottom
R1  150  [0603-RES]  49.31,15.33 0 top
R2  150  [0603-RES]  40.43,15.35 0 top
R3  150  [0603-RES]  31.24,15.27 0 top
R4  150  [0603-RES]  100.62,15.33 0 top
R5  150  [0603-RES]  91.74,15.35 0 top
R6  150  [0603-RES]  82.55,15.27 0 top
R7  150  [0603-RES]  151.93,15.33 0 top
R8  150  [0603-RES]  143.05,15.35 0 top
R9  150  [0603-RES]  133.86,15.27 0 top
R10  150  [0603-RES]  203.24,15.33 0 top
R11  150  [0603-RES]  194.35,15.35 0 top
R12  150  [0603-RES]  185.17,15.27 0 top
R13  150  [0603-RES]  254.54,15.33 0 top
R14  150  [0603-RES]  245.66,15.35 0 top
R15  150  [0603-RES]  236.48,15.27 0 top
R16  150  [0603-RES]  49.31,67.81 0 top
R17  150  [0603-RES]  40.43,67.83 0 top
R18  150  [0603-RES]  31.24,67.74 0 top
R19  150  [0603-RES]  100.62,67.81 0 top
R20  150  [0603-RES]  91.74,67.83 0 top
R21  150  [0603-RES]  82.55,67.74 0 top
R22  150  [0603-RES]  151.93,67.81 0 top
R23  150  [0603-RES]  143.05,67.83 0 top
R24  150  [0603-RES]  133.86,67.74 0 top
R25  150  [0603-RES]  203.24,67.81 0 top
R26  150  [0603-RES]  194.35,67.83 0 top
R27  150  [0603-RES]  185.17,67.74 0 top
R28  150  [0603-RES]  254.54,67.81 0 top
R29  150  [0603-RES]  245.66,67.83 0 top
R30  150  [0603-RES]  236.48,67.74 0 top
S1  S1  [AYZ0202]  22.35,54.55 180 top
S2  SWITCH-MOMENTARY-2SMD  [TACTILE-SWITCH-SMD]  53.85,42.87 180 top
S3  S3  [AYZ0202]  43.69,42.99 90 top
S4  S1  [AYZ0202]  73.66,54.55 180 top
S5  SWITCH-MOMENTARY-2SMD  [TACTILE-SWITCH-SMD]  105.16,42.87 180 top
S6  S3  [AYZ0202]  95,42.99 90 top
S7  S1  [AYZ0202]  124.97,54.55 180 top
S8  SWITCH-MOMENTARY-2SMD  [TACTILE-SWITCH-SMD]  156.47,42.87 180 top
S9  S3  [AYZ0202]  146.31,42.99 90 top
S10  S1  [AYZ0202]  176.28,54.55 180 top
S11  SWITCH-MOMENTARY-2SMD  [TACTILE-SWITCH-SMD]  207.77,42.87 180 top
S12  S3  [AYZ0202]  197.61,42.99 90 top
S13  S1  [AYZ0202]  227.59,54.55 180 top
S14  SWITCH-MOMENTARY-2SMD  [TACTILE-SWITCH-SMD]  259.08,42.87 180 top
S15  S3  [AYZ0202]  248.92,42.99 90 top
S16  S1  [AYZ0202]  22.35,107.03 180 top
S17  SWITCH-MOMENTARY-2SMD  [TACTILE-SWITCH-SMD]  53.85,95.34 180 top
S18  S3  [AYZ0202]  43.69,95.47 90 top
S19  S1  [AYZ0202]  73.66,107.03 180 top
S20  SWITCH-MOMENTARY-2SMD  [TACTILE-SWITCH-SMD]  105.16,95.34 180 top
S21  S3  [AYZ0202]  95,95.47 90 top
S22  S1  [AYZ0202]  124.97,107.03 180 top
S23  SWITCH-MOMENTARY-2SMD  [TACTILE-SWITCH-SMD]  156.47,95.34 180 top
S24  S3  [AYZ0202]  146.31,95.47 90 top
S25  S1  [AYZ0202]  176.28,107.03 180 top
S26  SWITCH-MOMENTARY-2SMD  [TACTILE-SWITCH-SMD]  207.77,95.34 180 top
S27  S3  [AYZ0202]  197.61,95.47 90 top
S28  S1  [AYZ0202]  227.59,107.03 180 top
S29  SWITCH-MOMENTARY-2SMD  [TACTILE-SWITCH-SMD]  259.08,95.34 180 top
S30  S3  [AYZ0202]  248.92,95.47 90 top
SLIDEOFF  SEWTAP8  [PETAL-MEDIUM-2SIDE]  43.69,37.79 0 top
SLIDEOFF1  SEWTAP8  [PETAL-MEDIUM-2SIDE]  95,37.79 0 top
SLIDEOFF2  SEWTAP8  [PETAL-MEDIUM-2SIDE]  146.31,37.79 0 top
SLIDEOFF3  SEWTAP8  [PETAL-MEDIUM-2SIDE]  197.61,37.79 0 top
SLIDEOFF4  SEWTAP8  [PETAL-MEDIUM-2SIDE]  248.92,37.79 0 top
SLIDEOFF5  SEWTAP8  [PETAL-MEDIUM-2SIDE]  43.69,90.26 0 top
SLIDEOFF6  SEWTAP8  [PETAL-MEDIUM-2SIDE]  95,90.26 0 top
SLIDEOFF7  SEWTAP8  [PETAL-MEDIUM-2SIDE]  146.31,90.26 0 top
SLIDEOFF8  SEWTAP8  [PETAL-MEDIUM-2SIDE]  197.61,90.26 0 top
SLIDEOFF9  SEWTAP8  [PETAL-MEDIUM-2SIDE]  248.92,90.26 0 top
SLIDEON  SEWTAP8  [PETAL-MEDIUM-2SIDE]  43.69,48.09 180 top
SLIDEON1  SEWTAP8  [PETAL-MEDIUM-2SIDE]  95,48.09 180 top
SLIDEON2  SEWTAP8  [PETAL-MEDIUM-2SIDE]  146.31,48.09 180 top
SLIDEON3  SEWTAP8  [PETAL-MEDIUM-2SIDE]  197.61,48.09 180 top
SLIDEON4  SEWTAP8  [PETAL-MEDIUM-2SIDE]  248.92,48.09 180 top
SLIDEON5  SEWTAP8  [PETAL-MEDIUM-2SIDE]  43.69,100.57 180 top
SLIDEON6  SEWTAP8  [PETAL-MEDIUM-2SIDE]  95,100.57 180 top
SLIDEON7  SEWTAP8  [PETAL-MEDIUM-2SIDE]  146.31,100.57 180 top
SLIDEON8  SEWTAP8  [PETAL-MEDIUM-2SIDE]  197.61,100.57 180 top
SLIDEON9  SEWTAP8  [PETAL-MEDIUM-2SIDE]  248.92,100.57 180 top
U$1  [LOGO-LILYPAD]  70.49,17.06 0 top
U$2  [LOGO-LILYPAD]  19.18,17.06 0 top
U$3  [LOGO-LILYPAD]  22.15,43.42 0 bottom
U$4  [LOGO-L]  49.37,16.25 0 bottom
U$5  [LOGO-L]  43.11,42.42 90 bottom
U$6  [LOGO-L]  52.89,42.39 90 bottom
U$7  [LOGO-L]  40.48,16.25 0 bottom
U$8  [LOGO-L]  31.34,16.12 0 bottom
U$9  [LOGO-LILYPAD]  73.46,43.42 0 bottom
U$10  [LOGO-L]  94.42,42.42 90 bottom
U$11  [LOGO-L]  104.2,42.39 90 bottom
U$12  [LOGO-L]  100.68,16.25 0 bottom
U$13  [LOGO-L]  91.79,16.25 0 bottom
U$14  [LOGO-L]  82.64,16.12 0 bottom
U$15  [LOGO-LILYPAD]  121.8,17.06 0 top
U$16  [LOGO-LILYPAD]  124.77,43.42 0 bottom
U$17  [LOGO-L]  145.73,42.42 90 bottom
U$18  [LOGO-L]  155.51,42.39 90 bottom
U$19  [LOGO-L]  151.99,16.25 0 bottom
U$20  [LOGO-L]  143.1,16.25 0 bottom
U$21  [LOGO-L]  133.95,16.12 0 bottom
U$22  [LOGO-LILYPAD]  173.1,17.06 0 top
U$23  [LOGO-LILYPAD]  176.08,43.42 0 bottom
U$24  [LOGO-L]  197.04,42.42 90 bottom
U$25  [LOGO-L]  206.81,42.39 90 bottom
U$26  [LOGO-L]  203.29,16.25 0 bottom
U$27  [LOGO-L]  194.4,16.25 0 bottom
U$28  [LOGO-L]  185.26,16.12 0 bottom
U$29  [LOGO-LILYPAD]  224.41,17.06 0 top
U$30  [LOGO-LILYPAD]  227.38,43.42 0 bottom
U$31  [LOGO-L]  248.34,42.42 90 bottom
U$32  [LOGO-L]  258.12,42.39 90 bottom
U$33  [LOGO-L]  254.6,16.25 0 bottom
U$34  [LOGO-L]  245.71,16.25 0 bottom
U$35  [LOGO-L]  236.57,16.12 0 bottom
U$36  [LOGO-LILYPAD]  19.18,69.54 0 top
U$37  [LOGO-LILYPAD]  22.15,95.9 0 bottom
U$38  [LOGO-L]  43.11,94.9 90 bottom
U$39  [LOGO-L]  52.89,94.87 90 bottom
U$40  [LOGO-L]  49.37,68.73 0 bottom
U$41  [LOGO-L]  40.48,68.73 0 bottom
U$42  [LOGO-L]  31.34,68.6 0 bottom
U$43  [LOGO-LILYPAD]  70.49,69.54 0 top
U$44  [LOGO-LILYPAD]  73.46,95.9 0 bottom
U$45  [LOGO-L]  94.42,94.9 90 bottom
U$46  [LOGO-L]  104.2,94.87 90 bottom
U$47  [LOGO-L]  100.68,68.73 0 bottom
U$48  [LOGO-L]  91.79,68.73 0 bottom
U$49  [LOGO-L]  82.64,68.6 0 bottom
U$50  [LOGO-LILYPAD]  121.8,69.54 0 top
U$51  [LOGO-LILYPAD]  124.77,95.9 0 bottom
U$52  [LOGO-L]  145.73,94.9 90 bottom
U$53  [LOGO-L]  155.51,94.87 90 bottom
U$54  [LOGO-L]  151.99,68.73 0 bottom
U$55  [LOGO-L]  143.1,68.73 0 bottom
U$56  [LOGO-L]  133.95,68.6 0 bottom
U$57  [LOGO-LILYPAD]  173.1,69.54 0 top
U$58  [LOGO-LILYPAD]  176.08,95.9 0 bottom
U$59  [LOGO-L]  197.04,94.9 90 bottom
U$60  [LOGO-L]  206.81,94.87 90 bottom
U$61  [LOGO-L]  203.29,68.73 0 bottom
U$62  [LOGO-L]  194.4,68.73 0 bottom
U$63  [LOGO-L]  185.26,68.6 0 bottom
U$64  [LOGO-LILYPAD]  224.41,69.54 0 top
U$65  [LOGO-LILYPAD]  227.38,95.9 0 bottom
U$66  [LOGO-L]  248.34,94.9 90 bottom
U$67  [LOGO-L]  258.12,94.87 90 bottom
U$68  [LOGO-L]  254.6,68.73 0 bottom
U$69  [LOGO-L]  245.71,68.73 0 bottom
U$70  [LOGO-L]  236.57,68.6 0 bottom

## Library data of the parts
BAT1-BAT10 = SparkFun-Electromechanical; PROD_ID: BATT-10373
BATB- BATB-1-BATB-19 BATT+ BATT+1-BATT+19 BUTTON- BUTTON-1-BUTTON-9 BUTTONS BUTTONS1-BUTTONS9 LED+1-LED+30 LED-1-LED-30 SLIDEOFF SLIDEOFF1-SLIDEOFF9 SLIDEON SLIDEON1-SLIDEON9 U$1-U$70 = LilyPad-Wearables
E$1 = SparkFun-Retired
E$3 E$4 FD1-FD40 LOGO1-LOGO30 = SparkFun-Aesthetics
LED1-LED30 = SparkFun-LED; PROD_ID: DIO-09955
MB1-MB100 MB+ MB+1-MB+9 MB- MB-1-MB-9 = Testing
R1-R30 = SparkFun-Resistors; PROD-ID: 13326
S1 S3 S4 S6 S7 S9 S10 S12 S13 S15 S16 S18 S19 S21 S22 S24 S25 S27 S28 S30 = SparkFun-Electromechanical; PROD_ID: SWCH-08179; SF_ID: COM-00597
S2 S5 S8 S11 S14 S17 S20 S23 S26 S29 = SparkFun-Electromechanical; PROD_ID: SWCH-08247

## Nets
BUTTON: BUTTONS.1 LED1.A LED+1.1 MB3.P$1 MB9.P$1 S2.1
BUTTON1: BUTTONS1.1 LED4.A LED+4.1 MB14.P$1 MB20.P$1 S5.1
BUTTON2: BUTTONS2.1 LED7.A LED+7.1 MB24.P$1 MB30.P$1 S8.1
BUTTON3: BUTTONS3.1 LED10.A LED+10.1 MB34.P$1 MB40.P$1 S11.1
BUTTON4: BUTTONS4.1 LED13.A LED+13.1 MB44.P$1 MB50.P$1 S14.1
BUTTON5: BUTTONS5.1 LED16.A LED+16.1 MB54.P$1 MB60.P$1 S17.1
BUTTON6: BUTTONS6.1 LED19.A LED+19.1 MB64.P$1 MB70.P$1 S20.1
BUTTON7: BUTTONS7.1 LED22.A LED+22.1 MB74.P$1 MB80.P$1 S23.1
BUTTON8: BUTTONS8.1 LED25.A LED+25.1 MB84.P$1 MB90.P$1 S26.1
BUTTON9: BUTTONS9.1 LED28.A LED+28.1 MB94.P$1 MB100.P$1 S29.1
GND: BAT1.NEGATIVE BATB-2.1 BATB-.1 LED-1.1 LED-2.1 LED-3.1 MB6.P$1 MB7.P$1 MB8.P$1 MB-.P$1 R1.2 R2.2 R3.2
GND1: BAT2.NEGATIVE BATB-1.1 BATB-3.1 LED-4.1 LED-5.1 LED-6.1 MB17.P$1 MB18.P$1 MB19.P$1 MB-1.P$1 R4.2 R5.2 R6.2
GND2: BAT3.NEGATIVE BATB-4.1 BATB-5.1 LED-7.1 LED-8.1 LED-9.1 MB27.P$1 MB28.P$1 MB29.P$1 MB-2.P$1 R7.2 R8.2 R9.2
GND3: BAT4.NEGATIVE BATB-6.1 BATB-7.1 LED-10.1 LED-11.1 LED-12.1 MB37.P$1 MB38.P$1 MB39.P$1 MB-3.P$1 R10.2 R11.2 R12.2
GND4: BAT5.NEGATIVE BATB-8.1 BATB-9.1 LED-13.1 LED-14.1 LED-15.1 MB47.P$1 MB48.P$1 MB49.P$1 MB-4.P$1 R13.2 R14.2 R15.2
GND5: BAT6.NEGATIVE BATB-10.1 BATB-11.1 LED-16.1 LED-17.1 LED-18.1 MB57.P$1 MB58.P$1 MB59.P$1 MB-5.P$1 R16.2 R17.2 R18.2
GND6: BAT7.NEGATIVE BATB-12.1 BATB-13.1 LED-19.1 LED-20.1 LED-21.1 MB67.P$1 MB68.P$1 MB69.P$1 MB-6.P$1 R19.2 R20.2 R21.2
GND7: BAT8.NEGATIVE BATB-14.1 BATB-15.1 LED-22.1 LED-23.1 LED-24.1 MB77.P$1 MB78.P$1 MB79.P$1 MB-7.P$1 R22.2 R23.2 R24.2
GND8: BAT9.NEGATIVE BATB-16.1 BATB-17.1 LED-25.1 LED-26.1 LED-27.1 MB87.P$1 MB88.P$1 MB89.P$1 MB-8.P$1 R25.2 R26.2 R27.2
GND9: BAT10.NEGATIVE BATB-18.1 BATB-19.1 LED-28.1 LED-29.1 LED-30.1 MB97.P$1 MB98.P$1 MB99.P$1 MB-9.P$1 R28.2 R29.2 R30.2
N$1: BAT1.POSITIVE@1 BAT1.POSITIVE@2 BAT1.POSITIVE@3 BAT1.POSITIVE@4 S1.2
N$2: BAT2.POSITIVE@1 BAT2.POSITIVE@2 BAT2.POSITIVE@3 BAT2.POSITIVE@4 S4.2
N$4: LED4.C R4.1
N$5: LED5.C R5.1
N$6: LED6.C R6.1
N$8: BAT3.POSITIVE@1 BAT3.POSITIVE@2 BAT3.POSITIVE@3 BAT3.POSITIVE@4 S7.2
N$9: LED7.C R7.1
N$10: LED8.C R8.1
N$11: LED1.C R1.1
N$12: LED2.C R2.1
N$13: LED3.C R3.1
N$14: LED9.C R9.1
N$16: BAT4.POSITIVE@1 BAT4.POSITIVE@2 BAT4.POSITIVE@3 BAT4.POSITIVE@4 S10.2
N$17: LED10.C R10.1
N$18: LED11.C R11.1
N$19: LED12.C R12.1
N$21: BAT5.POSITIVE@1 BAT5.POSITIVE@2 BAT5.POSITIVE@3 BAT5.POSITIVE@4 S13.2
N$22: LED13.C R13.1
N$23: LED14.C R14.1
N$24: LED15.C R15.1
N$26: BAT6.POSITIVE@1 BAT6.POSITIVE@2 BAT6.POSITIVE@3 BAT6.POSITIVE@4 S16.2
N$27: LED16.C R16.1
N$28: LED17.C R17.1
N$29: LED18.C R18.1
N$31: BAT7.POSITIVE@1 BAT7.POSITIVE@2 BAT7.POSITIVE@3 BAT7.POSITIVE@4 S19.2
N$32: LED19.C R19.1
N$33: LED20.C R20.1
N$34: LED21.C R21.1
N$36: BAT8.POSITIVE@1 BAT8.POSITIVE@2 BAT8.POSITIVE@3 BAT8.POSITIVE@4 S22.2
N$37: LED22.C R22.1
N$38: LED23.C R23.1
N$39: LED24.C R24.1
N$41: BAT9.POSITIVE@1 BAT9.POSITIVE@2 BAT9.POSITIVE@3 BAT9.POSITIVE@4 S25.2
N$42: LED25.C R25.1
N$43: LED26.C R26.1
N$44: LED27.C R27.1
N$46: BAT10.POSITIVE@1 BAT10.POSITIVE@2 BAT10.POSITIVE@3 BAT10.POSITIVE@4 S28.2
N$47: LED28.C R28.1
N$48: LED29.C R29.1
N$49: LED30.C R30.1
SWITCH: LED2.A LED3.A LED+2.1 LED+3.1 MB4.P$1 MB5.P$1 MB10.P$1 S3.2 SLIDEOFF.1
SWITCH1: LED5.A LED6.A LED+5.1 LED+6.1 MB12.P$1 MB15.P$1 MB16.P$1 S6.2 SLIDEOFF1.1
SWITCH2: LED8.A LED9.A LED+8.1 LED+9.1 MB22.P$1 MB25.P$1 MB26.P$1 S9.2 SLIDEOFF2.1
SWITCH3: LED11.A LED12.A LED+11.1 LED+12.1 MB32.P$1 MB35.P$1 MB36.P$1 S12.2 SLIDEOFF3.1
SWITCH4: LED14.A LED15.A LED+14.1 LED+15.1 MB42.P$1 MB45.P$1 MB46.P$1 S15.2 SLIDEOFF4.1
SWITCH5: LED17.A LED18.A LED+17.1 LED+18.1 MB52.P$1 MB55.P$1 MB56.P$1 S18.2 SLIDEOFF5.1
SWITCH6: LED20.A LED21.A LED+20.1 LED+21.1 MB62.P$1 MB65.P$1 MB66.P$1 S21.2 SLIDEOFF6.1
SWITCH7: LED23.A LED24.A LED+23.1 LED+24.1 MB72.P$1 MB75.P$1 MB76.P$1 S24.2 SLIDEOFF7.1
SWITCH8: LED26.A LED27.A LED+26.1 LED+27.1 MB82.P$1 MB85.P$1 MB86.P$1 S27.2 SLIDEOFF8.1
SWITCH9: LED29.A LED30.A LED+29.1 LED+30.1 MB92.P$1 MB95.P$1 MB96.P$1 S30.2 SLIDEOFF9.1
VCC: BATT+2.1 BATT+.1 BUTTON-.1 MB1.P$1 MB2.P$1 MB+.P$1 S1.1 S2.3 S3.3 SLIDEON.1
VCC1: BATT+1.1 BATT+3.1 BUTTON-1.1 MB11.P$1 MB13.P$1 MB+1.P$1 S4.1 S5.3 S6.3 SLIDEON1.1
VCC2: BATT+4.1 BATT+5.1 BUTTON-2.1 MB21.P$1 MB23.P$1 MB+2.P$1 S7.1 S8.3 S9.3 SLIDEON2.1
VCC3: BATT+6.1 BATT+7.1 BUTTON-3.1 MB31.P$1 MB33.P$1 MB+3.P$1 S10.1 S11.3 S12.3 SLIDEON3.1
VCC4: BATT+8.1 BATT+9.1 BUTTON-4.1 MB41.P$1 MB43.P$1 MB+4.P$1 S13.1 S14.3 S15.3 SLIDEON4.1
VCC5: BATT+10.1 BATT+11.1 BUTTON-5.1 MB51.P$1 MB53.P$1 MB+5.P$1 S16.1 S17.3 S18.3 SLIDEON5.1
VCC6: BATT+12.1 BATT+13.1 BUTTON-6.1 MB61.P$1 MB63.P$1 MB+6.P$1 S19.1 S20.3 S21.3 SLIDEON6.1
VCC7: BATT+14.1 BATT+15.1 BUTTON-7.1 MB71.P$1 MB73.P$1 MB+7.P$1 S22.1 S23.3 S24.3 SLIDEON7.1
VCC8: BATT+16.1 BATT+17.1 BUTTON-8.1 MB81.P$1 MB83.P$1 MB+8.P$1 S25.1 S26.3 S27.3 SLIDEON8.1
VCC9: BATT+18.1 BATT+19.1 BUTTON-9.1 MB91.P$1 MB93.P$1 MB+9.P$1 S28.1 S29.3 S30.3 SLIDEON9.1